# EAGLE board untitled (EAGLE 9.6.2)
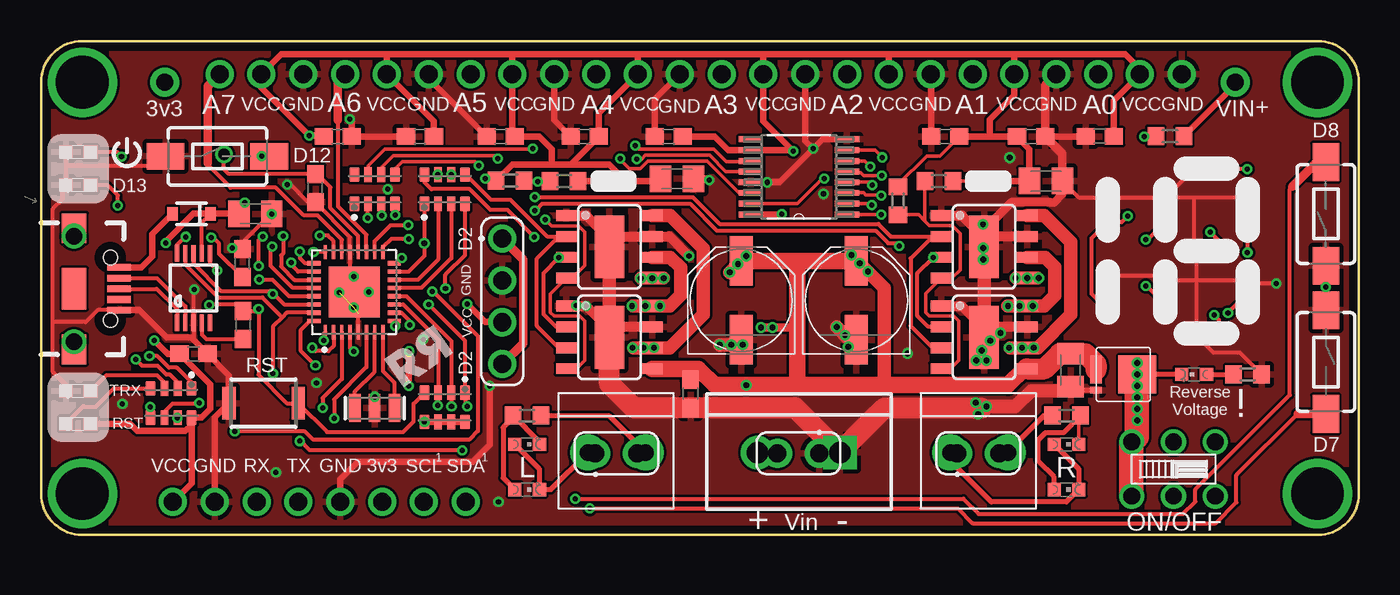
[diagram p0: board, top side]
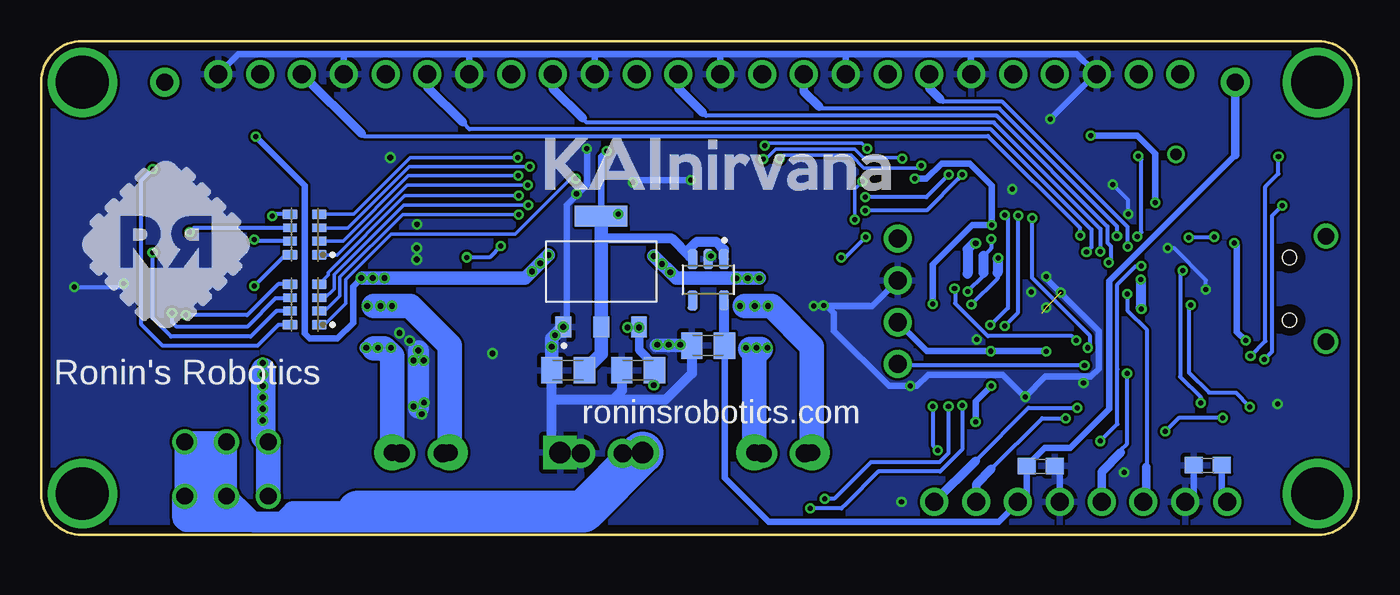
[diagram p1: board, bottom side, seen from below]

Size 80 x 30 mm. Coordinates in mm from the lower left corner, seen from the top.
Outline: 0,2.5 arc90 2.5,0 77.5,0 arc90 80,2.5 80,27.5 arc90 77.5,30 2.5,30 arc90 0,27.5 0,2.5
Copper layers (1*16): Top 0.035mm / dielectric 1.6mm / Bottom 0.035mm
Design rules "Elecrow_2-layer_PCB_eagle_rule": minimum track width 6mil, minimum drill 12mil, track to track 6mil, track to pad 6mil, pad to pad 6mil, via to via 8mil, smd to smd 0mil, copper to edge 20mil, drill to drill 10mil, minimum pad ring 6mil, minimum via ring 6mil, stop-mask expansion 0mil, vias tented up to drill 100mil, thermal gap 10mil

## Footprints (pad centres in the part's own frame; a part is rotated, then mirrored left to right if it is on the bottom)
C0805K = smd 1.3 x 1.6: 1 -1,0; 2 1,0
PANASONIC_D = smd 3 x 1.4: + 2.4,0; - -2.4,0
SOD-323 = smd 0.63 x 0.83: 1 -1.15,0; 2 1.15,0
USB-B-MICRO-SMD = smd 1.45 x 0.4: D+ 2.725,0; D- 2.725,0.65; GND 2.725,-1.3; ID 2.725,-0.65; VBUS 2.725,1.3 | smd 1.5 x 1.8: SHIELD1 0,3.685; SHIELD2 0,-3.685 | smd 1.5 x 2.5: SHIELD3 0,0 | hole 0.85: 2.2,1.9; 2.2,-1.9
1X2-3.5MM = drill 1 pad 2.184: 1 1.8,0; 2 -1.7,0
SCREWTERMINAL-5MM-2 = drill 1.3 pad 2.032 square: 1 0,0 | drill 1.3 pad 2.032: 2 5,0
1X01-CLEANBIG = drill 1.016 pad 1.778: 1 0,0
0603_LED_GREEN = smd 0.8 x 0.8: A 0,-0.75; C 0,0.75
DFN-8_3X3 = smd 2.29 x 2.29: D 0,0.8 | smd 0.4 x 0.7: G 0.96,-1.7 | smd 1.7 x 0.7: S -0.3,-1.7
RESCAXS80P320X160X70-8N = smd 0.61 x 0.9: 1 -1.24,-0.885; 4 1.24,-0.885; 5 1.24,0.885; 8 -1.24,0.885 | smd 0.53 x 0.9: 2 -0.4,-0.885; 3 0.4,-0.885; 6 0.4,0.885; 7 -0.4,0.885
R0603 = smd 1 x 1.1: 1 -0.85,0; 2 0.85,0
SKRK = smd 0.8 x 2: 1 -2.1,0; 2 2.1,0
TACTILE_SWITCH_SMD_6.0X3.5MM = smd 2.3 x 1.6: 1 -3.15,0; 2 3.15,0
MSOP10 = smd 1 x 0.25: 1 -2.113,1; 2 -2.113,0.5; 3 -2.113,0; 4 -2.113,-0.5; 5 -2.113,-1; 6 2.113,-1; 7 2.113,-0.5; 8 2.113,0; 9 2.113,0.5; 10 2.113,1
QFN50P500X500X90-33N = smd 0.86 x 0.26: 1 -2.435,1.75; 2 -2.435,1.25; 3 -2.435,0.75; 4 -2.435,0.25; 5 -2.435,-0.25; 6 -2.435,-0.75; 7 -2.435,-1.25; 8 -2.435,-1.75; 17 2.435,-1.75; 18 2.435,-1.25; 19 2.435,-0.75; 20 2.435,-0.25; 21 2.435,0.25; 22 2.435,0.75; 23 2.435,1.25; 24 2.435,1.75 | smd 0.26 x 0.86: 9 -1.75,-2.435; 10 -1.25,-2.435; 11 -0.75,-2.435; 12 -0.25,-2.435; 13 0.25,-2.435; 14 0.75,-2.435; 15 1.25,-2.435; 16 1.75,-2.435; 25 1.75,2.435; 26 1.25,2.435; 27 0.75,2.435; 28 0.25,2.435; 29 -0.25,2.435; 30 -0.75,2.435; 31 -1.25,2.435; 32 -1.75,2.435 | smd 3.1 x 3.1: 33 0,0
SOP65P640X120-16N = smd 1.473 x 0.356: 1 -2.921,2.286; 2 -2.921,1.626; 3 -2.921,0.965; 4 -2.921,0.33; 5 -2.921,-0.33; 6 -2.921,-0.965; 7 -2.921,-1.626; 8 -2.921,-2.286; 9 2.921,-2.286; 10 2.921,-1.626; 11 2.921,-0.965; 12 2.921,-0.33; 13 2.921,0.33; 14 2.921,0.965; 15 2.921,1.626; 16 2.921,2.286
SOT-223 = smd 0.96 x 1.26: 1 -2.3,-3.375; 2 0,-3.375; 3 2.3,-3.375 | smd 3.19 x 1.26: 4 0,3.375
SOT95P280X145-5N = smd 1.21 x 0.59: 1 -1.255,0.95; 2 -1.255,0; 3 -1.255,-0.95; 4 1.255,-0.95; 5 1.255,0.95
1X24DFR = drill 1.092 pad 1.702: P$1 0,0; P$2 2.54,0; P$3 5.08,0; P$4 7.62,0; P$5 10.16,0; P$6 12.7,0; P$7 15.24,0; P$8 17.78,0; P$9 20.32,0; P$10 22.86,0; P$11 25.4,0; P$12 27.94,0; P$13 30.48,0; P$14 33.02,0; P$15 35.56,0; P$16 38.1,0; P$17 40.64,0; P$18 43.18,0; P$19 45.72,0; P$20 48.26,0; P$21 50.8,0; P$22 53.34,0; P$23 55.88,0; P$24 58.42,0
RESONATOR-SMD = smd 0.7 x 1.7: 1 -1.2,0; 2 0,0; 3 1.2,0
C&K_HEX_DIP_SLIDE = drill 1.016: 1 -2.54,-1.651; 2 0,-1.651; 3 2.54,-1.651; 4 -2.54,1.651; 5 0,1.651; 6 2.54,1.651
SOIC127P600X170-8 = smd 1.27 x 0.66: 1 -2.607,1.905; 2 -2.607,0.635; 3 -2.607,-0.635; 4 -2.607,-1.905; 5 2.607,-1.905; 6 2.607,-0.635; 7 2.607,0.635; 8 2.607,1.905 | smd 1.778 x 3.81: P$1 0,0
C0603 = smd 1.1 x 1: 1 -0.85,0; 2 0.85,0
1X8DFR = drill 1.092 pad 1.702: P$1 0,0; P$2 2.54,0; P$3 5.08,0; P$4 7.62,0; P$5 10.16,0; P$6 12.7,0; P$7 15.24,0; P$8 17.78,0
HDRVR4W64P254_1X4_1016X240X800B = drill 1.105 pad 1.705: 1 0,0; 2 2.54,0; 3 5.08,0; 4 7.62,0
1X2 = drill 1.092 pad 1.778: P$1 0,0; P$2 2.54,0

## Placement (x,y rotation side)
C1  CAPACITOR_CER6  [C0805K]  38.59,21.64 0 top
C2  CAPACITOR_CER6  [C0805K]  13,19.5 0 top
C3  CAPACITOR_CER6  [C0805K]  48,10 180 bottom
C4  CAPACITOR_CER6  [C0805K]  43.75,10 180 bottom
C5  CAPACITOR_CER6  [C0805K]  61,21.5 0 top
C6  CAPACITOR_CER6  [C0805K]  39.5,11.5 180 bottom
C7  CAPACITOR_CER6  [C0805K]  62.5,10 270 top
C9  CAPACITOR_POLD  [PANASONIC_D]  49.5,14.25 90 top
C10  CAPACITOR_POLD  [PANASONIC_D]  42.5,14.25 90 top
D2  [SOD-323]  9.13,19.51 180 top
J1  [USB-B-MICRO-SMD]  2,14.95 0 top
J2  1X2-3.5MM  [1X2-3.5MM]  57,5 180 top
J3  1X2-3.5MM  [1X2-3.5MM]  35,5 180 top
J4  [SCREWTERMINAL-5MM-2]  48.5,5 180 top
JP1  [1X01-CLEANBIG]  72.5,27.5 0 top
JP2  [1X01-CLEANBIG]  7.5,27.5 0 top
L1  LED0603_R  [0603_LED_GREEN]  29.5,5.5 270 top
L2  LED0603_R  [0603_LED_GREEN]  29.5,2.75 270 top
L3  LED0603_R  [0603_LED_GREEN]  62.25,2.75 270 top
L4  LED0603_R  [0603_LED_GREEN]  62.25,5.5 270 top
L5  LED0603_R  [0603_LED_GREEN]  70.75,22.25 90 top
L6  LED0603_R  [0603_LED_GREEN]  73.25,19.75 0 top
L7  LED0603_R  [0603_LED_GREEN]  73.25,14.75 0 top
L8  LED0603_R  [0603_LED_GREEN]  70.75,12.25 90 top
L9  LED0603_R  [0603_LED_GREEN]  68.25,14.75 0 top
L10  LED0603_R  [0603_LED_GREEN]  68.25,19.75 0 top
L11  LED0603_R  [0603_LED_GREEN]  70.75,17.25 90 top
L12  LED0603_R  [0603_LED_GREEN]  64.75,19.75 0 top
L13  LED0603_R  [0603_LED_GREEN]  64.75,14.75 0 top
L14  LED0603_R  [0603_LED_GREEN]  34.75,21.5 90 top
L15  LED0603_R  [0603_LED_GREEN]  57.5,21.5 90 top
L16  LED0603_R  [0603_LED_GREEN]  2.25,23.25 90 top
L17  LED0603_R  [0603_LED_GREEN]  2.25,21.25 90 top
L18  LED0603_R  [0603_LED_GREEN]  2.25,8.75 90 top
L19  LED0603_R  [0603_LED_GREEN]  2.25,6.75 90 top
L20  LED0603_R  [0603_LED_GREEN]  70,9.75 90 top
Q1  AON7401  [DFN-8_3X3]  65.75,9.75 270 top
R1  YC164-JR-071K5  [RESCAXS80P320X160X70-8N]  64,14 90 bottom
R2  YC164-JR-071K5  [RESCAXS80P320X160X70-8N]  24.5,7.75 180 top
R3  YC164-JR-071K5  [RESCAXS80P320X160X70-8N]  64,18.25 90 bottom
R4  RESISTOR0603  [R0603]  29.5,7.25 180 top
R5  RESISTOR0603  [R0603]  62.25,7.25 0 top
R6  RESISTOR0603  [R0603]  31.75,21.5 0 top
R7  YC164-JR-071K5  [RESCAXS80P320X160X70-8N]  7.89,8.02 180 top
R8  RESISTOR0603  [R0603]  54.5,21.5 0 top
R9  RESISTOR0603  [R0603]  28.47,21.53 180 top
R10  RESISTOR0603  [R0603]  52.02,20.31 90 top
R11  YC164-JR-071K5  [RESCAXS80P320X160X70-8N]  20.25,21 0 top
R12  YC164-JR-071K5  [RESCAXS80P320X160X70-8N]  24.5,21 0 top
R13  RESISTOR0603  [R0603]  73.25,9.75 180 top
R14  RESISTOR0603  [R0603]  68.53,24.23 0 top
S1  SKRKAEE010  [SKRK]  13.5,8 0 top
S2  MOMENTARY-SWITCH-SPST-SMD-6.0X3.5MM  [TACTILE_SWITCH_SMD_6.0X3.5MM]  10.7,23 0 top
S3  MOMENTARY-SWITCH-SPST-SMD-6.0X3.5MM  [TACTILE_SWITCH_SMD_6.0X3.5MM]  78,19.5 90 top
S4  MOMENTARY-SWITCH-SPST-SMD-6.0X3.5MM  [TACTILE_SWITCH_SMD_6.0X3.5MM]  78,10.5 270 top
U1  CH340ESMD  [MSOP10]  9.25,15 90 top
U2  ATMEGA328PB-MU  [QFN50P500X500X90-33N]  19,14.75 90 top
U3  SN74HC595MPWREP  [SOP65P640X120-16N]  46,21.75 180 top
U4  NCP1117ST33T3G  [SOT-223]  46,16 0 bottom
U5  TLV73333  [SOT95P280X145-5N]  39.5,15.5 270 bottom
U$1  1X24DFR  [1X24DFR]  69.25,28 180 top
U$2  RESONATORSMD  [RESONATOR-SMD]  20.25,7.71 180 top
U$3  C&K_SWITCH  [C&K_HEX_DIP_SLIDE]  68.75,4 0 top
U$4  DRV8872  [SOIC127P600X170-8]  34.5,12 0 top
U$5  DRV8872  [SOIC127P600X170-8]  34.5,17.5 0 top
U$6  DRV8872  [SOIC127P600X170-8]  57.25,12 0 top
U$7  CAPACITOR_CER4  [C0603]  16.66,21.08 90 top
U$8  CAPACITOR_CER4  [C0603]  9.25,11 180 top
U$9  CAPACITOR_CER4  [C0603]  12.25,12.75 270 top
U$10  CAPACITOR_CER4  [C0603]  12.22,16.51 90 top
U$11  DRV8872  [SOIC127P600X170-8]  57.25,17.5 0 top
U$12  CAPACITOR_CER4  [C0603]  9.17,4.22 0 bottom
U$13  1X8DFR  [1X8DFR]  8,2 0 top
U$14  CAPACITOR_CER4  [C0603]  19.32,4.18 180 bottom
U$15  FML_1X4  [HDRVR4W64P254_1X4_1016X240X800B]  28,18 270 top
U$16  CAPACITOR_CER4  [C0603]  18,24.2 180 top
U$17  CAPACITOR_CER4  [C0603]  38.1,24.2 0 top
U$18  CAPACITOR_CER4  [C0603]  64.27,24.21 0 top
U$19  CAPACITOR_CER4  [C0603]  54.9,24.2 0 top
U$20  CAPACITOR_CER4  [C0603]  60.1,24.2 180 top
U$21  CAPACITOR_CER4  [C0603]  27.9,24.2 0 top
U$22  CAPACITOR_CER4  [C0603]  23,24.2 0 top
U$23  CAPACITOR_CER4  [C0603]  33,24.2 0 top
U$24  1X2  [1X2]  33.66,4.95 0 top
U$25  1X2  [1X2]  55.63,4.95 0 top
U$26  1X2  [1X2]  47.24,4.95 180 top
U$27  CAPACITOR_CER4  [C0603]  39.43,8.57 90 top

## Library data of the parts
C1-C7 C9 C10 L1-L20 R4-R6 R8-R10 R13 R14 U$7-U$10 U$12 U$14 U$16-U$23 U$27 = pasif_com1
D2 U$2 = SparkFun
J1 = SparkFun-Connectors; PROD_ID: CONN-11752
J2 J3 JP1 JP2 = adafruit
J4 = SparkFun-Connectors; SF_SKU: PRT-08432
Q1 = AON7401
R1-R3 R7 R11 R12 = YC164-JR-071K5; AVAILABILITY: Unavailable; DESCRIPTION: Resistor network: Y; 1.5kΩ; SMD; 1206; No.of resistors: 4; 63mW; ±5%; MF: Yageo; MP: YC164-JR-071K5; PACKAGE: 1206 Yageo; PRICE: None
S1 = SKRKAEE010; AVAILABILITY: Unavailable; DESCRIPTION: Switch Tactile N.O. SPST Round Button Gull Wing 0.05A 12VDC 1.57N SMD T/R; MF: ALPS; MP: SKRKAEE010; PACKAGE: None; PRICE: None
S2-S4 = SparkFun-Switches; PROD_ID: SWCH-00815; SF_SKU: COM-08229
U1 = CH340E
U2 = atmega; MANUFACTURER: MICROCHIP; PACKAGE: QFN-32; PARTREV: C; STANDARD: IPC 7351B
U3 = 74HC595; DESCRIPTION: Enhanced Product 8-Bit Shift Registers With 3-State Output Registers 16-TSSOP -55 to 125; DIGI-KEY_PART_NUMBER: 296-27413-1-ND; DIGI-KEY_PURCHASE_URL: https://www.digikey.com.tr/product-detail/en/texas-instruments/SN74HC595MPWREP/296-27413-1-ND/2288061?utm_source=snapeda&utm_medium=aggregator&utm_campaign=symbol; MF: Texas Instruments; MP: SN74HC595MPWREP; PACKAGE: TSSOP-16 Texas Instruments
U4 = IC; CREATED_BY: PCBLayout.com; DIGIKEY_PART_NUMBER: NCP1117ST33T3GOSTR-ND; MANUFACTURER: ON Semiconductor; MPN: NCP1117ST33T3G; PACKAGE: SOT-223
U5 = TLV73318PDBVR; DESCRIPTION: Capacitor-Free, 300-mA, Low-Dropout Regulator with Foldback Current Limit for Portable Devices 5-SOT-23 -40 to 125; DIGI-KEY_PART_NUMBER: 296-40669-1-ND; DIGI-KEY_PURCHASE_URL: https://www.digikey.com/product-detail/en/texas-instruments/TLV73318PDBVR/296-40669-1-ND/5178546?utm_source=snapeda&utm_medium=aggregator&utm_campaign=symbol; MF: Texas Instruments; MP: TLV73318PDBVR; PACKAGE: SOT-23 Texas Instruments
U$1 U$13 U$15 U$24-U$26 = header_3d
U$3 = c&k switch 6 dip
U$4-U$6 U$11 = icv1

## Nets
3V3: C6.1 JP2.1 U5.5 U$13.P$6 U$14.2
A0: U2.23 U$1.P$3
A1: U2.24 U$1.P$6
A2: U2.25 U$1.P$9
A3: U2.26 U$1.P$12
A4: U2.27 U$1.P$15
A5: U2.28 U$1.P$18
A6: U2.19 U$1.P$21
A7: U2.22 U$1.P$24
ARF: U2.20 U$7.2
D2: U2.32 U$15.1 U$15.4
D3: R12.4 U2.1
D4: R11.2 U2.2
D5: R11.3 U2.9
D6: R11.4 U2.10
D7: R2.3 S4.2 U2.11
D8: R2.2 S3.2 U2.12
D9: R12.3 U2.13
D10: R12.2 U2.14
D11: R12.1 U2.15
D12: R2.1 S2.2 U2.16
D13: R7.7 U2.17
GND: C1.2 C2.2 C3.2 C4.2 C5.2 C6.2 C7.2 C9.- C10.- J1.GND J4.1 L5.C L6.C L7.C L8.C L9.C L10.C L11.C L12.C L13.C L16.C L17.C L18.C Q1.G R13.1 S1.1 S2.1 S3.1 S4.1 U1.3 U2.5 U2.21 U3.8 U3.13 U4.1 U5.2 U$1.P$1 U$1.P$4 U$1.P$7 U$1.P$10 U$1.P$13 U$1.P$16 U$1.P$19 U$1.P$22 U$2.2 U$4.1 U$4.7 U$4.P$1 U$5.1 U$5.7 U$5.P$1 U$6.1 U$6.7 U$6.P$1 U$7.1 U$8.1 U$10.2 U$11.1 U$11.7 U$11.P$1 U$12.1 U$13.P$2 U$13.P$5 U$14.1 U$15.2 U$16.1 U$17.1 U$18.1 U$19.1 U$20.1 U$21.1 U$22.1 U$23.1 U$26.P$1 U$27.1
N$1: U1.10 U$10.1
N$2: R11.8
N$3: J1.D- U1.2
N$4: L16.A R7.1
N$6: J1.D+ U1.1
N$7: D2.2 J1.VBUS
N$8: U1.4 U$9.2
N$9: L17.A R7.2
N$10: L20.A R13.2
N$11: L18.A R7.3
N$12: L19.C R7.4
N$13: J4.2 U$3.2 U$3.3 U$3.5 U$3.6 U$26.P$2
N$14: JP1.1 R14.2
N$15: L15.C R8.2
N$17: J3.2 R4.1 U$4.6 U$5.8 U$24.P$2
N$18: R1.1 U3.15
N$24: R6.1 R9.1 U$4.4 U$5.4
N$25: J2.2 R5.1 U$6.6 U$11.8 U$25.P$2
N$26: R1.2 U3.1
N$29: L14.C R6.2
N$30: R11.1
N$31: L1.C L2.A R4.2
N$32: R8.1 R10.1 U$6.4 U$11.4
N$33: L3.A L4.C R5.2
N$34: J3.1 L1.A L2.C U$4.8 U$5.6 U$24.P$1
N$35: J2.1 L3.C L4.A U$6.8 U$11.6 U$25.P$1
N$36: R1.3 U3.2
N$37: L12.A L13.A R3.5
N$38: R3.1 U3.4
N$39: R3.2 U3.5
N$40: R3.3 U3.6
N$41: R3.4 U3.7
N$42: R1.4 U3.3
N$44: L5.A R1.8
N$45: L6.A R1.7
N$46: L7.A R1.6
N$47: L8.A R1.5
N$48: L9.A R3.8
N$49: L10.A R3.7
N$50: L11.A R3.6
OC1: U2.7 U$2.3
OC2: U2.8 U$2.1
PW: L20.C Q1.D U$3.1 U$3.4
RD3: R12.5 U$4.3 U$5.2
RD4: R11.7 U3.11
RD5: R11.6 U3.12
RD6: R11.5 U3.14
RD9: R12.6 U$6.3 U$11.2
RD10: R12.7 U$6.2 U$11.3
RD11: R12.8 U$4.2 U$5.3
RST: R2.4 R7.5 S1.2 U2.29 U$9.1
RX: U1.8 U2.30 U$13.P$3
SCL1: U2.6 U$13.P$7
SDA1: U2.3 U$13.P$8
TRXLED: R7.6 U1.6
TX: U1.9 U2.31 U$13.P$4
VCC: C1.1 C2.1 C3.1 C5.1 D2.1 L14.A L15.A L19.A R2.5 R2.6 R2.7 R2.8 R7.8 R9.2 R10.2 U1.7 U2.4 U2.18 U3.10 U3.16 U4.2 U4.4 U5.1 U5.3 U$1.P$2 U$1.P$5 U$1.P$8 U$1.P$11 U$1.P$14 U$1.P$17 U$1.P$20 U$1.P$23 U$8.2 U$12.2 U$13.P$1 U$15.3 U$16.2 U$17.2 U$18.2 U$19.2 U$20.2 U$21.2 U$22.2 U$23.2
VIN: C4.1 C7.1 C9.+ C10.+ Q1.S R14.1 U4.3 U$4.5 U$5.5 U$6.5 U$11.5 U$27.2

## Tracks (layer width: path | path; a pad name or v marks a point on that pad's centre or on a via)
3V3
  Bottom 0.406: U$13.P$6 20.39,2.31 | 20.39,2.31 20.17,2.53 U$14.2 19.06,5.3 17.51,5.3 15.16,7.64 15.16,15.42 7.5,23.08 | C6.1 38.5,3.47 35.81,0.79 21.85,0.79 20.39,2.25 20.39,2.31
  Bottom 0.508: JP2.1 7.5,23.08
  Bottom 0.61: U5.5 38.55,11.55 C6.1
A0  (via drill 0.3)
  Top 0.254: U2.23 17.75,17.85 17.41,18.19 v16.92,18.19
  Bottom 0.254: 60.54,24.37 60.4,24.23 22.53,24.23 16.92,18.63 v16.92,18.19
  Bottom 0.508: U$1.P$3 60.54,24.37
A1  (via drill 0.3)
  Top 0.254: U2.24 16.54,17.18 v16.53,17.19
  Bottom 0.254: v16.53,17.19 16.24,17.48 16.24,18.56 22.33,24.65 54,24.65 54.42,25.07
  Bottom 0.508: U$1.P$6 56.55,27.2 54.42,25.07
A2  (via drill 0.3)
  Top 0.254: U2.25 16.04,16.5 15.71,16.83 v15.71,17.21
  Bottom 0.254: v15.71,17.21 15.69,17.23 15.69,18.59 22.16,25.06 46.86,25.06 47.13,25.33
  Bottom 0.508: U$1.P$9 48.93,27.13 47.13,25.33
A3  (via drill 0.3)
  Top 0.254: U2.26 15.6,16 15.18,16.43 v15.18,16.55
  Bottom 0.254: v15.18,16.55 15.06,16.67 15.06,17.54 15.27,17.76 15.27,18.75 21.99,25.47 39.65,25.47 39.82,25.64
  Bottom 0.508: U$1.P$12 41.31,27.13 39.82,25.64
A4  (via drill 0.3)
  Top 0.254: v14.68,18.16 14.68,17.1 14.56,16.98 14.56,16.31 15.38,15.5 U2.27
  Bottom 0.254: 32.76,26.01 32.66,25.91 21.83,25.91 14.68,18.76 v14.68,18.16
  Bottom 0.508: U$1.P$15 33.69,26.93 32.76,26.01
A5  (via drill 0.3)
  Top 0.254: U2.28 15.28,15 13.92,16.37 13.92,17.4 v14.03,17.52
  Bottom 0.152: 25.47,26.53 25.5,26.5 25.4,26.46
  Bottom 0.254: v14.03,17.52 14.05,17.53 14.05,18.72 21.64,26.31 25.25,26.31 25.4,26.46
  Bottom 0.508: U$1.P$18 26.07,27.13 25.47,26.53 25.4,26.46
A6
  Top 0.254: U2.19 19.75,18.24 18.02,19.97 18.02,25.19
  Top 0.508: U$1.P$21 18.02,27.57 18.02,25.19
A7
  Top 0.254: U2.22 18.25,17.93 16.78,19.4 15.94,19.4 14.25,21.09 11.51,21.09 10.11,22.49 10.11,22.57
  Top 0.508: U$1.P$24 10.11,27.28 10.11,22.57
ARF  (via drill 0.7)
  Top 0.254: v11.09,23.12 11.09,22.22 11.39,21.92 16.65,21.92 U$7.2 16.76,21.93 17.56,21.13 17.56,19.86 19.25,18.17 U2.20
D2  (via drill 0.3)
  Top 0.254: U2.32 16.31,13 15.73,12.42 15.73,11.21 v16.66,10.29 | 28.02,10.4 U$15.4
  Top 0.508: 28.02,10.4 29.26,11.64 29.26,16.74 U$15.1
  Bottom 0.254: v16.66,10.29 27.91,10.29 U$15.4
D3  (via drill 0.3)
  Top 0.254: U2.1 17.15,12.21 v17.15,11.8 | v24.55,14.96 24.55,15.81 25.74,17.01 R12.4
  Bottom 0.254: v17.15,11.8 17.43,12.08 22.52,12.08 24.52,14.07 24.52,14.93 v24.55,14.96
D4  (via drill 0.3)
  Top 0.254: U2.2 17.75,11.47 17.44,11.16 16.67,11.16 v16.46,11.37 | v19.84,19.24 19.84,20.1 R11.2
  Bottom 0.254: v19.84,19.24 19.84,15.62 16.35,12.12 16.35,11.48 v16.46,11.37
D5  (via drill 0.3)
  Top 0.254: U2.9 21.51,13 v21.51,12.7 | v20.69,19.41 20.65,19.45 R11.3
  Bottom 0.254: v21.51,12.7 20.69,13.51 v20.69,19.41
D6  (via drill 0.3)
  Top 0.254: v22.37,12.75 22.37,13 21.87,13.5 U2.10 | R11.4 v21.49,19.45 v21.5,19.44
  Bottom 0.254: v21.5,19.44 21.31,19.25 21.31,13.78 22.34,12.75 v22.37,12.75
D7  (via drill 0.3)
  Top 0.254: U2.11 21.97,14 24.1,11.88 R2.3 24.1,7.89 v24.08,7.87 | v33.31,1.6 55.66,1.6 56.54,0.71 71.31,0.71 72.57,1.97 72.57,3.64 76.28,7.35
  Top 0.508: S4.2 76.28,7.35
  Bottom 0.254: v24.08,7.87 24.08,5.18 25.42,3.84 29.16,3.84 31.13,1.88 31.41,1.6 v33.31,1.6
D8  (via drill 0.3)
  Top 0.254: U2.12 22.17,14.5 24.9,11.77 R2.2 v24.9,7.83 v24.91,7.82 | v32.43,2.19 55.98,2.19 56.91,1.26 69.32,1.26 70.08,2.02 70.08,2.76 75.82,8.5 75.82,21.02 75.96,21.16
  Top 0.508: S3.2 77.45,22.65 75.96,21.16
  Bottom 0.254: v24.91,7.82 24.91,4.96 25.46,4.41 29.62,4.41 31.81,2.22 32.4,2.22 v32.43,2.19
D9
  Top 0.254: R12.3 24.9,16.82 23.08,15 U2.13
D10
  Top 0.254: R12.2 24.1,16.73 22.86,15.5 U2.14
D11  (via drill 0.35)
  Top 0.254: R12.1 v23.26,17.72 23.26,16.94 22.32,16 U2.15
  Bottom 0.61: v23.26,17.72 23.39,17.72 23.75,17.35 23.75,15.88
D12  (via drill 0.3)
  Top 0.254: v23.52,13.99 v23.53,13.99 25.74,11.78 R2.1 25.74,7.92 v25.86,7.8 | v21.9,16.81 21.6,16.5 U2.16 | v25.57,5.14 16.3,5.14 15.69,5.76 v15.69,5.7 | v13.21,16.33 13.21,17.89 v13.46,18.14
  Top 0.406: S2.2 v13.4,23
  Bottom 0.254: 21.93,15.94 21.93,15.58 v23.52,13.99 | v25.86,7.8 25.86,5.44 v25.57,5.14 | v15.69,5.7 14.66,6.73 14.66,10.06 14.66,15.22 13.55,16.33 v13.21,16.33 | v13.46,18.14 13.2,18.39 13.2,22.8 v13.4,23
  Bottom 0.61: v21.9,16.81 21.93,16.78 21.93,15.94
D13  (via drill 0.3)
  Top 0.152: R7.7 8.5,7 v8.27,7.1
  Top 0.254: U2.17 20.75,17.48 21.26,17.98 v22.32,17.98 | v23.73,14.79 23.8,14.79 26.51,12.09 26.51,6.3 25.98,5.77 16.52,5.77 16.02,6.28 v11.76,6.28
  Bottom 0.254: v8.27,7.1 10.94,7.1 v11.76,6.28 | 22.77,16.96 22.32,17.41 v22.32,17.98 | 22.77,15.94 22.77,15.77 23.73,14.8 v23.73,14.79
  Bottom 0.61: 22.77,15.94 22.77,16.96
GND  (via drill 0.3, 0.35)  (2 unrouted)
  Top 0.254: v57.4,7.8 57.3,7.7 57.1,7.7 57,7.8 57,7.78 56.89,7.89 | v56.75,8.03 56.89,7.89 | 56.89,7.38 56.89,7.89 | 9.38,11.72 9.25,11.85 U1.3 9.25,14.88 v9.28,14.91 | L18.C 1.5,9.12 0.71,9.9 0.71,12.93 | 0.71,12.93 0.71,19.82 1.27,20.38 1.27,21.02 L17.C 1.5,22.4 | J1.GND 3.42,13.65 2.7,12.93 0.71,12.93 | C2.2 13.94,19.5 12.22,17.79 U$10.2 12.17,17.41 v11.59,17.41 | U2.5 19.25,13.43 19.24,13.44 | L16.C 1.5,22.4 | S2.1 6.95,22.4 1.5,22.4 | v14.94,21.28 15.14,21.28 16.19,20.23 U$7.1 16.66,20.18 18.75,18.09 U2.21 18.75,15.94 v18.98,15.71 | U3.13 v44.1,21.42 | 46.81,23.4 v46.87,23.45 | C5.2 63,20.5 L12.C L10.C 68.42,20.67 | L5.C 68.42,20.67 | L6.C 69.97,20.5 | 69.97,20.5 68.59,20.5 68.42,20.67 | 69.97,20.5 70,20.47 L11.C 70.13,17.12 70.13,15.5 | 70.13,15.5 L9.C 68.01,15.74 64.99,15.74 L13.C | 70.13,15.5 L7.C 73.47,15.28 v74.98,15.28 | 70.13,15.5 70.13,12.38 L8.C 71.17,11.08 72.77,11.08 R13.1 | S3.1 v78,15.05
  Top 0.305: Q1.G 62.71,8.79 C7.2
  Top 0.406: J1.GND 5.96,13.65 7.62,11.99 9.11,11.99 9.38,11.72 U$8.1 11.4,9.7 S1.1 10.54,7.14 U$13.P$2 | U$2.2 20.25,8.39 v20.26,8.4 | U$13.P$5 18.16,3.38 19.21,4.43 26.19,4.43 27.22,5.46 v27.22,9.04 | U$1.P$16 31.15,25.2 U$23.1 | U$1.P$13 37.25,26.48 U$17.1 | U$1.P$7 54.05,27.96 U$19.1 | U$18.1 U$20.1 | C1.2 40.47,21.64 v40.55,21.56 | U$1.P$10 46.39,23.93 v46.87,23.45 47.45,24.04 U3.8 | v44.1,21.42 44.83,21.42 46.81,23.4 | U$22.1 U$16.1 18.85,25.16 v18.74,25.27 | U$21.1 23.53,27.72 U$1.P$19 | S4.1 v78,15.05
  Top 0.508: U$11.P$1 57.25,18.55 58.92,20.22 61.25,20.22 61.27,20.2 61.5,20.2 62,20.7 C5.2 62,23.15 U$20.1 60.95,27.32 U$1.P$4
  Top 0.61: 34.3,18.2 34.36,18.14 U$5.7 38.15,18.13 v39.33,16.95 | 34.3,18.2 34.3,17.7 U$5.P$1 | U$5.1 33.09,19.41 34.3,18.2 | U$4.1 v33.09,13.91 34.5,12.5 | 34.5,12.5 U$4.P$1 | U$4.7 34.64,12.63 34.5,12.5 | U$11.7 57.37,18.14 57.2,18.3 | U$11.1 55.9,19.41 57.25,18.05 U$11.P$1 | U$6.1 55.9,13.91 57.25,12.55 | 57.25,12.55 U$6.P$1 | U$6.7 57.34,12.63 57.25,12.55
  Top 0.813: U$5.P$1 34.5,12.5 | U$11.P$1 57.25,12.55 | v41.2,11.55 v41.9,11.55 | C10.- 42.6,11.75 v42.6,11.55 | C9.- 49.07,11.85 U4.1 | C7.2 62.25,8.75 60.1,8.75 59.15,7.8 57,7.8 | U$26.P$1 47.29,5 J4.1
  Top 1.27: 34.5,12.5 34.5,9.2 35.97,7.72 U$27.1 45.78,7.72 J4.1 51.2,7.7 57.1,7.7 | U$6.P$1 57.25,11.35 v57.1,11.2
  Bottom 0.254: 57.3,7.8 56.98,7.8 v56.75,8.03 | 56.89,7.38 56.89,7.39 57.3,7.8 | v57.4,7.8 57.3,7.8 | v9.28,14.91 9.28,15.48 11.22,17.41 v11.59,17.41 | C2.2 14,20.35 v14.94,21.28 | v78,15.05 75.21,15.05 v74.98,15.28
  Bottom 0.406: v18.98,15.71 18.98,15.58 15.78,12.38 15.78,10.09 16.26,9.62 19.03,9.62 v20.26,8.4 20.27,8.38 21.61,9.72 26.15,9.72 26.83,9.04 v27.22,9.04 28.52,9.04 31.88,12.39 31.88,13.48 32.3,13.91 | 32.3,13.91 v33.09,13.91 | U$15.2 29.56,13.91 32.3,13.91 | U$13.P$5 18.16,3.87 U$14.1 | U$1.P$22 16.08,28.17 | 16.08,28.17 17.12,29.21 23.55,29.21 | U$1.P$1 68.04,29.21 61.64,29.21 | 23.55,29.21 31.1,29.21 | 31.1,29.21 38.84,29.21 | 38.84,29.21 46.38,29.21 | 46.38,29.21 54.14,29.21 | 54.14,29.21 61.64,29.21 | U$1.P$19 23.55,28.02 23.55,29.21 | U$1.P$16 31.15,29.16 31.1,29.21 | U$1.P$13 38.77,29.14 38.84,29.21 | U$1.P$10 46.39,29.21 46.38,29.21 | U$1.P$7 54.01,29.08 54.14,29.21 | U$1.P$4 61.63,29.2 61.64,29.21 | U4.1 48.09,12.83 48.09,20.05 46.85,21.29 46.85,23.44 v46.87,23.45 | v40.55,21.56 43.96,21.56 v44.1,21.42 | v18.74,25.27 16.08,27.93 16.08,28.17 | U$12.1 10.02,2.52 U$13.P$2
  Bottom 0.61: C4.2 44.75,8.75 45.3,8.2 | J4.1 49,5.5 49,8.3 | 49,8.3 C3.2 | 45.3,8.2 48.9,8.2 49,8.3 | C6.2 40.5,9.8 42.1,8.2 45.3,8.2 | U5.2 39.5,16.78 v39.33,16.95
  Bottom 0.813: C3.2 49,11.93 U4.1 | 42.65,11.5 C6.2
  Bottom 1.27: v57.1,11.2 57.1,7.7
  other vias: 57.4,10.6 56.77,10.6 56.89,7.34 48.3,12.62 48.8,12.12 49,11.43 14,19.5 18.09,14.73 18.98,13.81 19.9,14.75 32.5,13.93 52.6,11.03 58.8,22.93 47.5,20.73 57.2,17.43 57.2,16.73 57.18,18.88 27.77,2.01 4.94,7.96 16.72,9.24 21.05,21 23.21,11.88 57.62,11.79 58.25,12.26 14.26,3.8
  pour Top: 0,2 0,28 arc-90 2,30 78,30 arc-90 80,28 80,2 arc-90 78,0 2,0 arc-90
  pour Bottom: 0,2 0,28 arc-90 2,30 78,30 arc-90 80,28 80,2 arc-90 78,0 2,0 arc-90
N$1  (via drill 0.3)
  Top 0.254: U$10.1 10.81,17.07 10.81,17.7 10.44,18.07 v10.33,18.07 | v8.78,18.11 8.73,18.11 8.25,17.63 U1.10
  Bottom 0.254: v10.33,18.07 10.3,18.1 v8.79,18.1 v8.78,18.11
N$3
  Top 0.254: J1.D- 7.03,15.6 8.75,13.88 U1.2
N$4  (via drill 0.3)
  Top 0.254: R7.1 9.13,9.27 8.22,10.17 7.75,10.17 7.06,10.87 v6.58,10.87 | v4.88,22.99 4.62,23.25 L16.A
  Bottom 0.254: v6.58,10.87 5.67,11.78 5.67,21.15 4.88,21.94 v4.88,22.99
N$5  (via drill 3.2)
  other vias: 77.5,2.5
N$6
  Top 0.254: J1.D+ 7.01,14.95 8.25,13.71 U1.1
N$7
  Top 0.406: J1.VBUS 6.07,16.25 6.74,16.92 6.74,18.27 D2.2
N$8
  Top 0.254: U1.4 9.75,12.18 10.03,11.9 U$9.2
N$9  (via drill 0.3)
  Top 0.254: R7.2 8.25,8.94 8.25,9.29 7.8,9.74 7.6,9.74 7.07,10.27 6.13,10.27 v5.75,10.65 | L17.A 4.03,21.25 4.65,20.64 v4.65,20
  Bottom 0.254: v5.75,10.65 5.26,11.14 5.26,19.4 v4.65,20
N$10
  Top 0.305: L20.A R13.2
N$11
  Top 0.254: L18.A 3.97,9.72 7.01,9.72 7.49,9.23 R7.3
N$12
  Top 0.254: L19.C 2.57,7.82 3.34,7.82 4.42,8.9 R7.4
N$13
  Top 0.813: U$26.P$2 43.55,4.95 J4.2
  Bottom 0.254: 65.22,0.89 67.29,0.89 U$3.2
  Bottom 1.27: U$3.2 68.13,1.73 | 68.13,1.73 67.19,0.79 | 67.19,0.79 60.5,0.79 | 67.19,0.79 71.19,0.79 71.39,0.99 71.39,1.22 | 71.39,1.22 71.39,2.25 U$3.3 | 68.13,1.73 70.65,1.73 71.17,1.22 71.39,1.22 | U$3.2 U$3.5 70.04,5.65 | 70.04,5.65 U$3.6 U$3.3 | U$3.3 69.96,2.35 | 69.96,2.35 U$3.2 | 70.04,5.65 70.04,2.43 69.96,2.35 | U$3.2 69.38,2.98 69.38,5.07 | 60.78,1.4 64.7,1.4 64.7,1.41 65.22,0.89
  Bottom 2.54: J4.2 47.1,1.4 60.78,1.4
N$14
  Top 0.406: R14.2 72.5,27.35 JP1.1
N$15
  Top 0.2: L15.C R8.2
N$16  (via drill 1)
  other vias: 2,18.15
N$17  (via drill 0.35)
  Top 0.152: v35.91,11.37 36,11.5 36,11.37 | v37.21,11.37 37.5,11.5 U$4.6 36.5,11.5 v36.57,11.37
  Top 0.305: R4.1 34.45,7.25 J3.2
  Top 0.813: U$5.8 38.19,19.41 40.19,17.39 40.19,13.41 38.16,11.37 v37.21,11.37 U$4.6 v36.57,11.37 36,11.37 35.97,11.37 | U$24.P$2 36.65,4.95 J3.2
  Bottom 0.813: 36.95,11.3 37.01,11.37 v37.21,11.37
  Bottom 1.5: J3.2 36.7,10.9 36.3,11.3 36.95,11.3
N$18  (via drill 0.3)
  Top 0.2: U3.15 45.91,20.12 47.43,21.64 v47.53,21.64
  Bottom 0.2: R1.1 62.83,12.76 61.52,14.07 61.52,15.52 58.75,18.28 51.22,18.28 47.85,21.64 v47.53,21.64
N$19  (via drill 3.2)
  other vias: 77.5,27.5
N$20  (via drill 1)
  other vias: 2,11.74
N$22  (via drill 3.2)
  other vias: 2.5,2.5
N$23  (via drill 3.2)
  other vias: 2.5,27.5
N$24  (via drill 0.3)
  Top 0.2: 31.95,15.65 U$5.4 32.23,15.59 33,16.36 33,18.4 32.63,18.77 30.99,18.77 v30.6,19.16 | 30.15,21.5 29.35,21.5 R9.1 | 30.15,21.5 v30.15,21.46 | R6.1 30.15,21.5
  Top 0.203: U$4.4 32.5,10.1 33,10.6 33,13 32.7,13.3 31.14,13.3 30.92,13.52 30.92,14.62 U$5.4
  Bottom 0.2: v30.6,19.16 30.6,21 v30.15,21.46
N$25  (via drill 0.35)
  Top 0.152: v58.76,11.37 59,11.5 59,11.37 | v60.26,11.37 60,11.5 U$6.6 59.5,11.5 v59.56,11.37
  Top 0.305: J2.2 58.7,5.05 60.9,7.25 R5.1
  Top 0.813: U$11.8 60.91,19.41 62.51,17.8 62.51,13.38 60.5,11.37 v60.26,11.37 U$6.6 v59.56,11.37 59,11.37 58.84,11.37 | J2.2 58.65,4.95 U$25.P$2
  Bottom 0.813: v60.26,11.37 60.22,11.33 59.16,11.33
  Bottom 1.5: J2.2 58.7,10.87 59.16,11.33 59.81,11.33
N$26  (via drill 0.3)
  Top 0.2: v51,19.47 48.93,19.47 U3.1
  Bottom 0.2: R1.2 62.77,13.6 61.87,14.5 61.87,15.66 58.06,19.47 v51,19.47
N$29
  Top 0.406: L14.C R6.2
N$31
  Top 0.305: L1.C 30.25,5.65 R4.2 28.65,7.13 28.05,6.53 28.05,3.45 L2.A
N$32
  Top 0.2: U$11.4 55.29,15.59 55.8,16.1 55.8,18.3 55.3,18.8 53.93,18.8 53.65,19.08 | 53.65,19.08 R8.1 | R10.1 53.27,19.46 53.65,19.08
  Top 0.203: U$11.4 53.7,14.65 53.7,13.52 53.92,13.3 55.4,13.3 55.7,13 55.7,10.6 55.19,10.1 U$6.4
N$33
  Top 0.2: L4.C 63,7.25 R5.2
  Top 0.305: 63,5.65 L4.C | R5.2 62.06,6.21 60.97,6.21 60.54,5.78 60.54,4.47 61.5,3.52 L3.A
N$34  (via drill 0.35)
  Top 0.152: v36.67,13.9 36.5,14 U$4.8 37.5,14 v37.57,13.9
  Top 0.305: L1.A 30.25,4 L2.C 30.95,2.75 J3.1
  Top 0.813: U$5.6 38.19,16.87 38.83,16.23 38.83,14.56 38.18,13.91 U$4.8 36,13.91 | 36,13.91 35.95,13.91 35.95,13.9 36,13.9 36,13.91 | J3.1 33.61,5 U$24.P$1
  Bottom 0.152: v37.57,13.9 37.5,14 37.28,13.9
  Bottom 1.5: J3.1 33.2,11.45 35.65,13.9 v35.87,13.9 37.28,13.9
N$35  (via drill 0.35)
  Top 0.152: v58.7,13.91 59,14 59,13.9 | U$6.8 59.5,14 v59.4,13.91
  Top 0.305: L4.A 63,4 L3.C 62.25,2 57.69,2 55.2,4.49 55.2,4.83 J2.1
  Top 0.813: U$11.6 60.96,16.87 61.55,16.27 61.55,14.55 60.91,13.91 v60.2,13.91 U$6.8 59,13.9 v58.7,13.9 | U$25.P$1 55.5,4.83 55.2,4.83
  Bottom 0.152: v59.4,13.91 59.5,14 59.5,13.92
  Bottom 1.5: J2.1 55.2,11.52 57.6,13.92 59.5,13.92 59.82,13.92
N$36  (via drill 0.3)
  Top 0.2: U3.2 50.34,20.12 v50.42,20.05
  Bottom 0.2: v50.42,20.05 57.98,20.05 62.22,15.81 62.22,14.95 62.82,14.35 63.06,14.35 R1.3
N$37  (via drill 0.3)
  Top 0.254: v65.98,19.38 65.6,19 L12.A 63.76,18.01 63.76,14.66 64.42,14 L13.A
  Bottom 0.254: R3.5 65.87,19.49 v65.98,19.38
N$38  (via drill 0.3)
  Top 0.2: U3.4 50.29,21.42 v50.45,21.27
  Bottom 0.2: v50.45,21.27 57.76,21.27 62.01,17.01 R3.1
N$39  (via drill 0.3)
  Top 0.2: v51.04,21.82 49.94,21.82 49.75,22.01 48.99,22.01 U3.5
  Bottom 0.2: R3.2 61.67,17.85 57.7,21.82 v51.04,21.82
N$40  (via drill 0.3)
  Top 0.2: U3.6 50.01,22.71 v50.34,22.38
  Bottom 0.2: v50.34,22.38 57.64,22.38 61.37,18.65 R3.3
N$41  (via drill 0.3)
  Top 0.2: v51.07,22.94 50.63,23.38 U3.7
  Bottom 0.2: R3.4 61.03,19.49 57.58,22.94 v51.07,22.94
N$42  (via drill 0.3)
  Top 0.2: v51.01,20.61 50.97,20.65 50.07,20.65 49.94,20.79 U3.3
  Bottom 0.2: R1.4 62.57,15.78 62.57,15.95 57.92,20.61 v51.01,20.61
N$44  (via drill 0.3)
  Top 0.254: v73.23,22.22 71.53,22.22 L5.A
  Bottom 0.254: R1.8 65.59,12.76 66.87,11.48 72.61,11.48 73.91,12.78 73.91,21.54 v73.23,22.22
N$45  (via drill 0.3)
  Top 0.254: L6.A v73.24,17.14
  Bottom 0.254: R1.7 65.72,13.6 67.28,12.04 72.11,12.04 73.24,13.17 v73.24,17.14
N$46  (via drill 0.3)
  Top 0.254: v72.06,13.49 72.57,14 L7.A
  Bottom 0.254: R1.6 64.9,14.38 65.74,14.38 67.49,12.63 71.77,12.63 72.06,12.92 v72.06,13.49
N$47  (via drill 0.3)
  Top 0.254: v71.21,13.35 71.5,13.06 L8.A
  Bottom 0.254: R1.5 65.61,15.24 67.5,13.35 v71.21,13.35
N$48  (via drill 0.3)
  Top 0.254: v67.07,15.13 67.12,15.13 L9.A
  Bottom 0.254: v67.07,15.13 67.05,15.13 65.17,17.01 R3.8
N$49  (via drill 0.3)
  Top 0.254: v67.06,17.94 67.19,17.94 L10.A
  Bottom 0.254: R3.7 66.97,17.85 v67.06,17.94
N$50  (via drill 0.3)
  Top 0.254: v70.98,18.39 71.5,17.87 L11.A
  Bottom 0.254: R3.6 70.72,18.65 v70.98,18.39
OC1
  Top 0.254: U$2.3 19.05,8.7 20.25,9.9 U2.7
OC2
  Top 0.254: U2.8 20.75,9.95 21.45,9.25 U$2.1
PW  (via drill 0.35)
  Top 0.152: v66.55,6.95 66.5,7 66.52,7 | 66.52,7.5 66.5,7.5 v66.55,7.65 | 66.52,8.5 66.5,8.5 v66.55,8.35 | v66.55,9.05 66.5,9 Q1.D
  Top 0.305: L20.C Q1.D
  Top 1.27: U$3.4 66.52,5.96
  Top 1.5: U$3.1 66.19,2.36 66.19,5.64 U$3.4 | 66.52,5.96 66.52,7 66.52,7.5 66.52,8.5 66.52,9.71
  Bottom 0.152: v66.55,10.45 66.5,10.5 66.52,10.01
  Bottom 1.27: U$3.4 66.52,5.96 | 66.52,10.01 66.55,9.97 Q1.D | 66.21,2.38 66.23,2.37
  Bottom 1.5: 66.52,5.96 66.52,10.01 | U$3.4 66.21,2.38
  other vias: 66.55,9.75
RD3
  Top 0.254: U$4.3 31.44,11.37 30.09,12.71 30.09,16.79 31.44,18.14 | 31.44,18.14 U$5.2 | R12.5 25.79,21.89 27.31,20.36 28.49,20.36 30.72,18.14 31.44,18.14
RD4  (via drill 0.3)
  Top 0.2: R11.7 19.85,22.44 20.86,23.44 29.82,23.44 v29.85,23.48 | U3.11 43.05,22.69 41.6,22.69 40.84,23.44 36.28,23.44 v36.08,23.64
  Bottom 0.2: v36.08,23.64 35.92,23.8 30.18,23.8 v29.85,23.48
RD5  (via drill 0.3)
  Top 0.2: R11.6 20.65,22.32 21.37,23.04 27.56,23.04 v27.73,22.87 | U3.12 41.57,22.08 40.59,23.06 36.68,23.06 36.46,22.84 36.17,22.84 v36.15,22.83
  Bottom 0.2: v27.73,22.87 27.77,22.91 30.1,22.91 30.61,23.43 35.4,23.43 36,22.83 v36.15,22.83
RD6  (via drill 0.3)
  Top 0.2: R11.5 21.49,22.25 21.91,22.67 26.34,22.67 v26.56,22.44 | v35.17,22.85 35.17,22.79 35.7,22.26 36.39,22.26 36.83,22.71 40.44,22.71 42.41,20.74 43.04,20.74 U3.14
  Bottom 0.2: v35.17,22.85 34.96,23.06 30.81,23.06 30.05,22.3 26.74,22.3 26.7,22.33 26.68,22.33 v26.56,22.44
RD9  (via drill 0.3)
  Top 0.254: U$11.2 54.13,18.14 | U$6.3 54.13,11.37 52.79,12.71 52.79,16.79 54.13,18.14 | v29.97,20.52 39.57,20.52 41.2,18.89 50.84,18.89 51.6,18.14 54.13,18.14
  Bottom 0.254: R12.6 26.26,20.52 v29.97,20.52
  other vias: 24.9,21.89
RD10  (via drill 0.3)
  Top 0.254: U$6.2 53.87,12.63 53.2,13.3 53.2,15.9 v54.16,16.87 U$11.3 | R12.7 v24.09,21.89 | v29.97,19.71 30.02,19.71 30.43,20.12 39.4,20.12 41.03,18.49 50.67,18.49 51.43,17.73 51.91,17.73 v52.1,17.54
  Bottom 0.254: v24.09,21.89 24.32,21.66 24.32,21.64 26.25,19.71 v29.97,19.71 | v52.1,17.54 52.77,16.87 v54.16,16.87
RD11  (via drill 0.3)
  Top 0.254: U$4.2 31.27,12.63 30.5,13.4 30.5,15.9 v31.44,16.84 31.5,16.9 31.86,16.9 U$5.3 | v29.94,18.09 29.94,18.11 28.28,19.76 27.27,19.76 26.02,21.01 23.69,21.01 23.26,21.44 R12.8
  Bottom 0.254: v29.94,18.09 31.19,16.84 v31.44,16.84
RST  (via drill 0.3)
  Top 0.254: R7.5 6.62,7.16 v6.62,7.78 | v10.22,13.97 10.25,14 11.84,14 U$9.1 13.06,13.6 v13.2,13.73 13.2,9.72 14.92,8 S1.2 17.36,6.24 21.98,6.24 22.62,6.88 22.62,7.97 23.26,8.61 R2.4 | v13.25,15.51 14.03,15.51 15.03,14.5 U2.29
  Bottom 0.254: v6.62,7.78 7.49,8.64 9.09,8.64 10.31,9.87 10.31,13.88 v10.22,13.97 | 13.19,13.74 v13.2,13.73
  Bottom 0.61: v13.25,15.51 13.25,13.8 13.19,13.74
RX  (via drill 0.3)
  Top 0.25: U1.8 9.25,16.5 10.92,14.83 13.91,14.83 14.08,14.66 | U2.30 14.74,14 14.11,14.63 v14.05,14.63
  Top 0.254: v14.05,14.63 14.08,14.66
  Bottom 0.254: v14.05,14.63 14.05,13.64 12.89,12.48 12.89,4.14 12.9,4.12
  Bottom 0.508: U$13.P$3 12.9,2.18 12.9,4.12
SCL1  (via drill 0.3)
  Top 0.254: U2.6 19.75,10.2 17.78,8.22 v17.78,7.08
  Bottom 0.254: 22.31,4 19.22,7.08 v17.78,7.08
  Bottom 0.508: U$13.P$7 23.24,3.07 22.31,4
SDA1  (via drill 0.3)
  Top 0.254: U2.3 18.25,9.46 17.09,8.31 v17.09,7.71
  Bottom 0.254: v17.09,7.71 20.06,7.71 23.27,4.51
  Bottom 0.508: U$13.P$8 23.27,4.51
TRXLED  (via drill 0.3)
  Top 0.254: U1.6 10.25,16.53 v10.7,16.07 | v9.61,8.01 9.61,8.03 9.6,8.03 9.54,7.97 7.96,7.97 7.49,7.5 R7.6
  Bottom 0.254: v10.7,16.07 10.84,15.93 10.84,9.6 9.61,8.37 v9.61,8.01
TX  (via drill 0.3)
  Top 0.25: U2.31 14.92,13.5 | 14.64,13.22 13.42,14.43 10.75,14.43 8.74,16.43 U1.9
  Top 0.254: 14.92,13.5 14.64,13.22 14.07,12.65 v14.07,9.82
  Bottom 0.254: v14.07,9.82 14.07,5.54 14.44,5.17 14.44,5.01
  Bottom 0.508: U$13.P$4 15.62,3.83 14.44,5.01
VCC  (via drill 0.3)
  Top 0.152: R2.5 23.5,7 v23.27,6.87
  Top 0.2: R10.2 52.02,21.28 53.76,23.02 54.57,23.02 U$19.2
  Top 0.254: U1.7 9.75,18.98 D2.1 | U2.4 18.75,11.36 v18.97,11.14 | U2.18 20.25,17.84 21.22,18.81 v22.28,18.81
  Top 0.406: L15.A C5.1 60,23.45 U$20.2 57.6,24.2 | U$19.2 57.6,24.2 | U$18.2 65.12,26.37 66.71,27.96 U$1.P$2 66.71,28.33 65.82,29.21 59.09,29.21 | v7.56,17.73 7.56,17.82 9.25,19.51 D2.1 C2.1 12.37,19.87 v12.37,20.18 | v6.88,11.8 7.68,11 U$8.2 10.27,9.13 10.27,7.66 9.73,7.13 R7.8 | L19.A 5.39,6.75 5.83,6.31 8.75,6.31 9.13,6.69 R7.8 | U$13.P$1 9.13,3.13 R7.8 | v22.33,9.04 22.33,11.15 v22.34,11.16 | R2.5 R2.7 | R2.7 R2.8 | R2.6 R2.7 | U$16.2 17.08,24.27 v16.27,24.27 13.37,27.17 U$1.P$23 14.58,29.21 20.93,29.21 | 20.93,29.21 28.7,29.21 | 28.7,29.21 36.21,29.21 | 36.21,29.21 43.87,29.21 | 43.87,29.21 51.5,29.21 | 51.5,29.21 59.09,29.21 | U$1.P$8 51.47,29.18 51.5,29.21 | 43.87,29.21 43.85,29.2 U$1.P$11 43.85,25.14 v45.66,23.33 45.61,23.38 U3.10 41.71,23.38 40.88,24.2 U$17.2 | 36.21,29.21 36.23,29.2 U$1.P$14 33.85,25.62 U$23.2 32.16,22.51 | 28.7,29.21 28.61,29.12 U$1.P$17 28.61,24.34 U$21.2 30.23,24.2 31,23.43 31,22.51 | 20.93,29.21 20.99,29.16 U$1.P$20 23.85,25.14 U$22.2 | 59.09,29.21 U$1.P$5 59.09,26.72 57.6,25.23 57.6,24.2 | C1.1 37.45,21.5 L14.A 34.49,22.51 32.16,22.51 | 31,22.51 28.61,22.51 R9.2 27.08,21.53 v26.97,21.64 | 31,22.51 32.16,22.51 | U$15.3 26.97,12.92 v25.87,14.02 | U3.16 44.96,19.46 v44.97,19.48
  Bottom 0.406: 45.9,18.7 46,18.7 | v6.88,11.8 7.41,12.33 7.41,17.58 v7.56,17.73 | v18.97,11.14 18.99,11.16 v22.34,11.16 26.24,11.16 U$15.3 | v23.27,6.87 23.27,8.1 v22.33,9.04 | v12.37,20.18 12.37,23.17 13.46,24.27 v16.27,24.27 | v45.66,23.33 46,22.99 U4.4 45.08,19.38 v44.97,19.48 | v26.97,21.64 26.26,21.64 25.33,22.57 23.63,22.57 22.28,21.23 v22.28,18.81 23.48,18.81 25.87,16.42 v25.87,14.02 | U$12.2 8.32,2.32 U$13.P$1
  Bottom 0.61: U5.3 40.65,16.95 | 40.65,16.95 41.69,18 46,18 | U5.1 38.55,17.35 39.02,17.82 40.18,17.82 40.65,17.35 40.65,16.95
  Bottom 0.813: U4.4 46,18.7 46,18 U4.2 46,11 C3.1
VIN  (via drill 0.3, 0.35)
  Top 0.152: v59.16,15.6 59,15.5 59.21,15.59 | v42.3,16.45 42.5,16.5 C10.+ 42.5,17 v42.8,16.95 | v36.41,15.59 36.5,15.5 U$5.5 37.5,15.5 v37.81,15.59 | 49.5,17 C9.+ | v60.56,15.6 60.5,15.5 60.49,15.6
  Top 0.406: R14.1 67.64,24.19 v66.97,24.19
  Top 0.508: v43.7,12.6 v44.4,12.6 45.9,12.6
  Top 0.813: 59.2,15.6 59.21,15.59 U$11.5 v59.86,15.6 60.49,15.6 | 37.77,15.6 U$5.5 36.44,15.59 | C10.+ v42.3,16.45 v41.8,15.95 | C9.+ 49.2,16.95 v49.2,17 | v49.7,16.5 v50.2,16 51.2,15 51.2,9.1
  Top 1.016: U$6.5 59.69,10.1 58.7,9.1 51.2,9.1 45.8,9.1 | 39.91,10.1 U$4.5 | 45.8,9.1 v42.8,9.1 40.9,9.1 39.91,10.1 | U$27.2 39.43,9.62 39.91,10.1 | C10.+ 45.9,16.65 | 45.9,16.65 C9.+ 49.55,16.65 v49.7,16.5 | 45.9,16.65 45.9,12.6 45.9,9.2 45.8,9.1
  Top 1.27: Q1.S 64.05,10.36 63.41,11 C7.1 61.83,11 60.92,10.1 U$6.5
  Bottom 0.406: v60.56,15.6 61.06,15.1 61.06,12.88 62.01,11.93 63.69,11.93 63.99,12.23 63.99,21.21 v66.97,24.19
  Bottom 0.508: C4.1 42.75,10.28 43.7,11.22 U4.3 44.38,12.62 v44.4,12.6
  Bottom 0.61: C4.1 42.8,9.95 v42.8,9.1
  Bottom 0.813: 36.39,15.59 U$5.5 38.11,15.59 41.44,15.59 v42.8,16.95 | v49.2,17 50.6,15.6 v59.86,15.6 60.5,15.6
  other vias: 37.11,15.59

## Text on the board
tPlace: 3v3 | A7 | VCC | GND | A6 | VCC | GND | A5 | VCC | GND | A4 | VCC | GND | A3 | VCC | GND | A2 | VCC | GND | A1 | VCC | GND | A0 | VCC | GND | VIN | + | D8 | D12 | D13 | D2 | GND | VCC | RST | D2 | TRX | Reverse / Voltage | ! | RST | 1 | 1 | D7 | VCC | GND | RX | TX | GND | 3v3 | SCL | SDA | L | R | + | Vin | - | ON/OFF
bPlace: Ronin's Robotics | roninsrobotics.com